# EAGLE board NSE2022_BATTERY_ver0 (EAGLE 9.6.0)
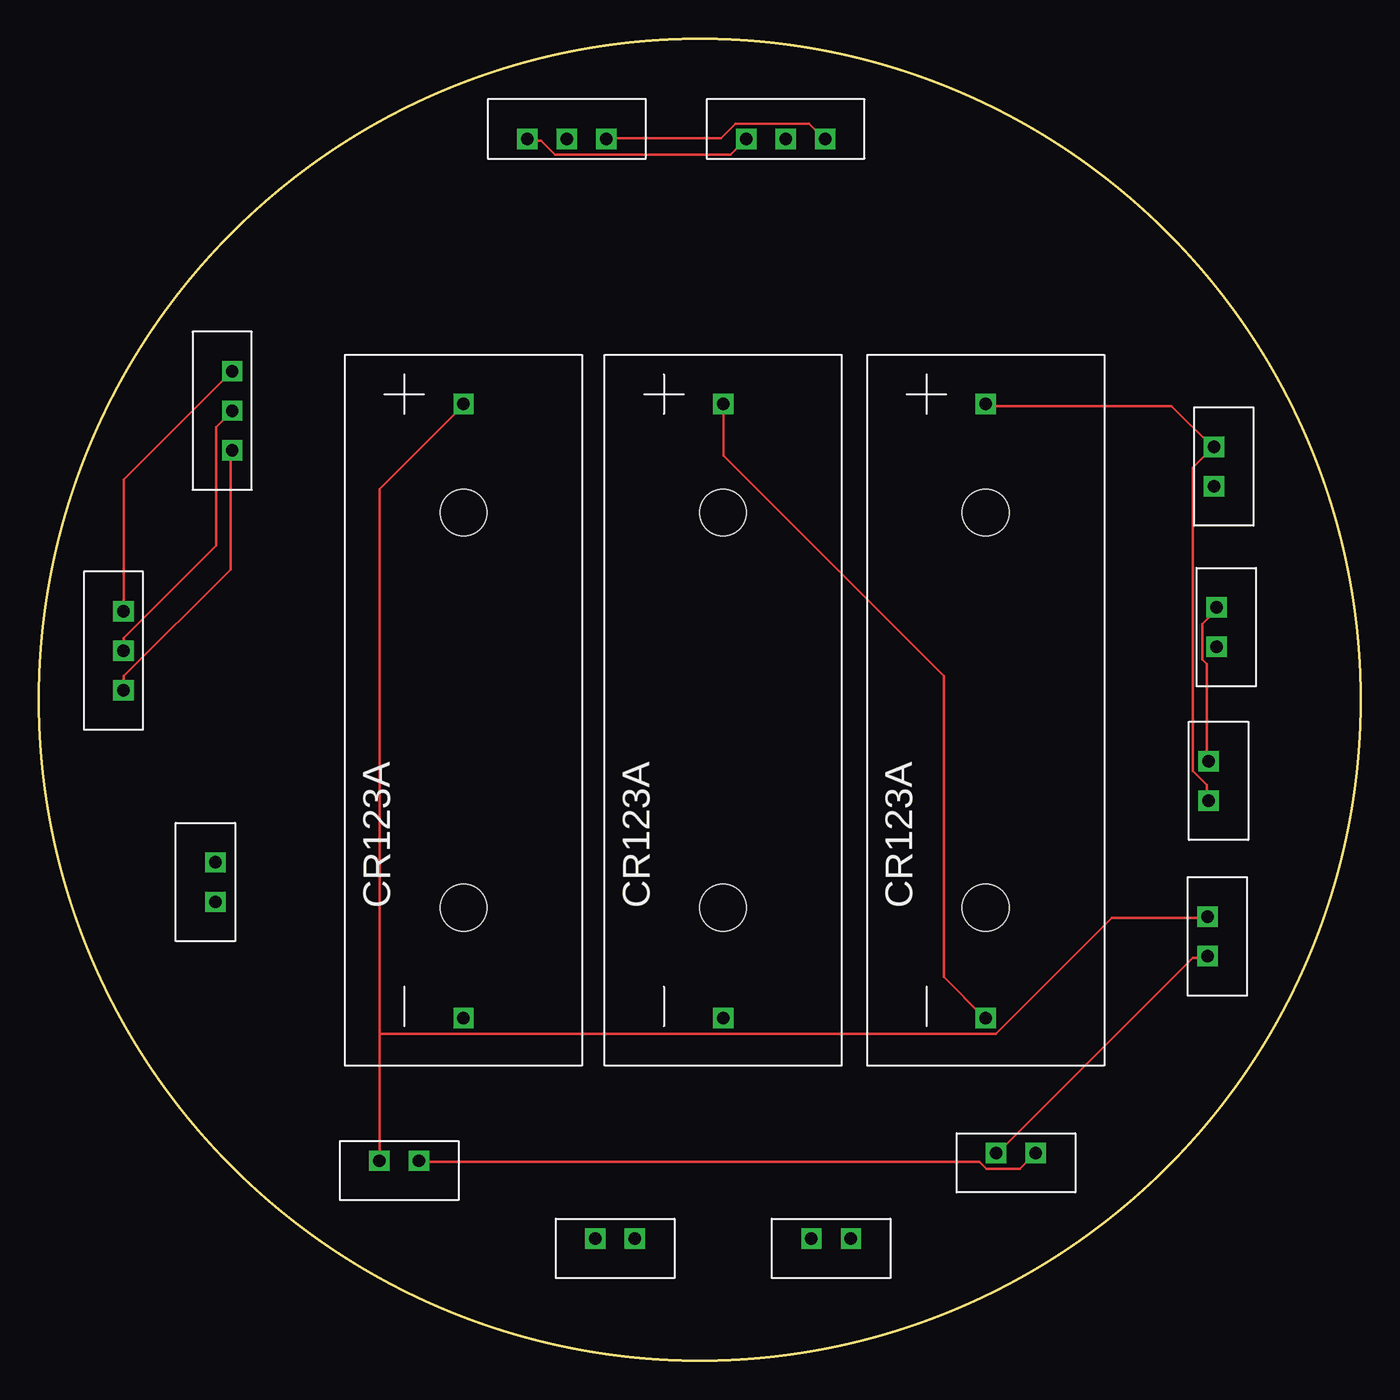
[diagram p0: board, top side]
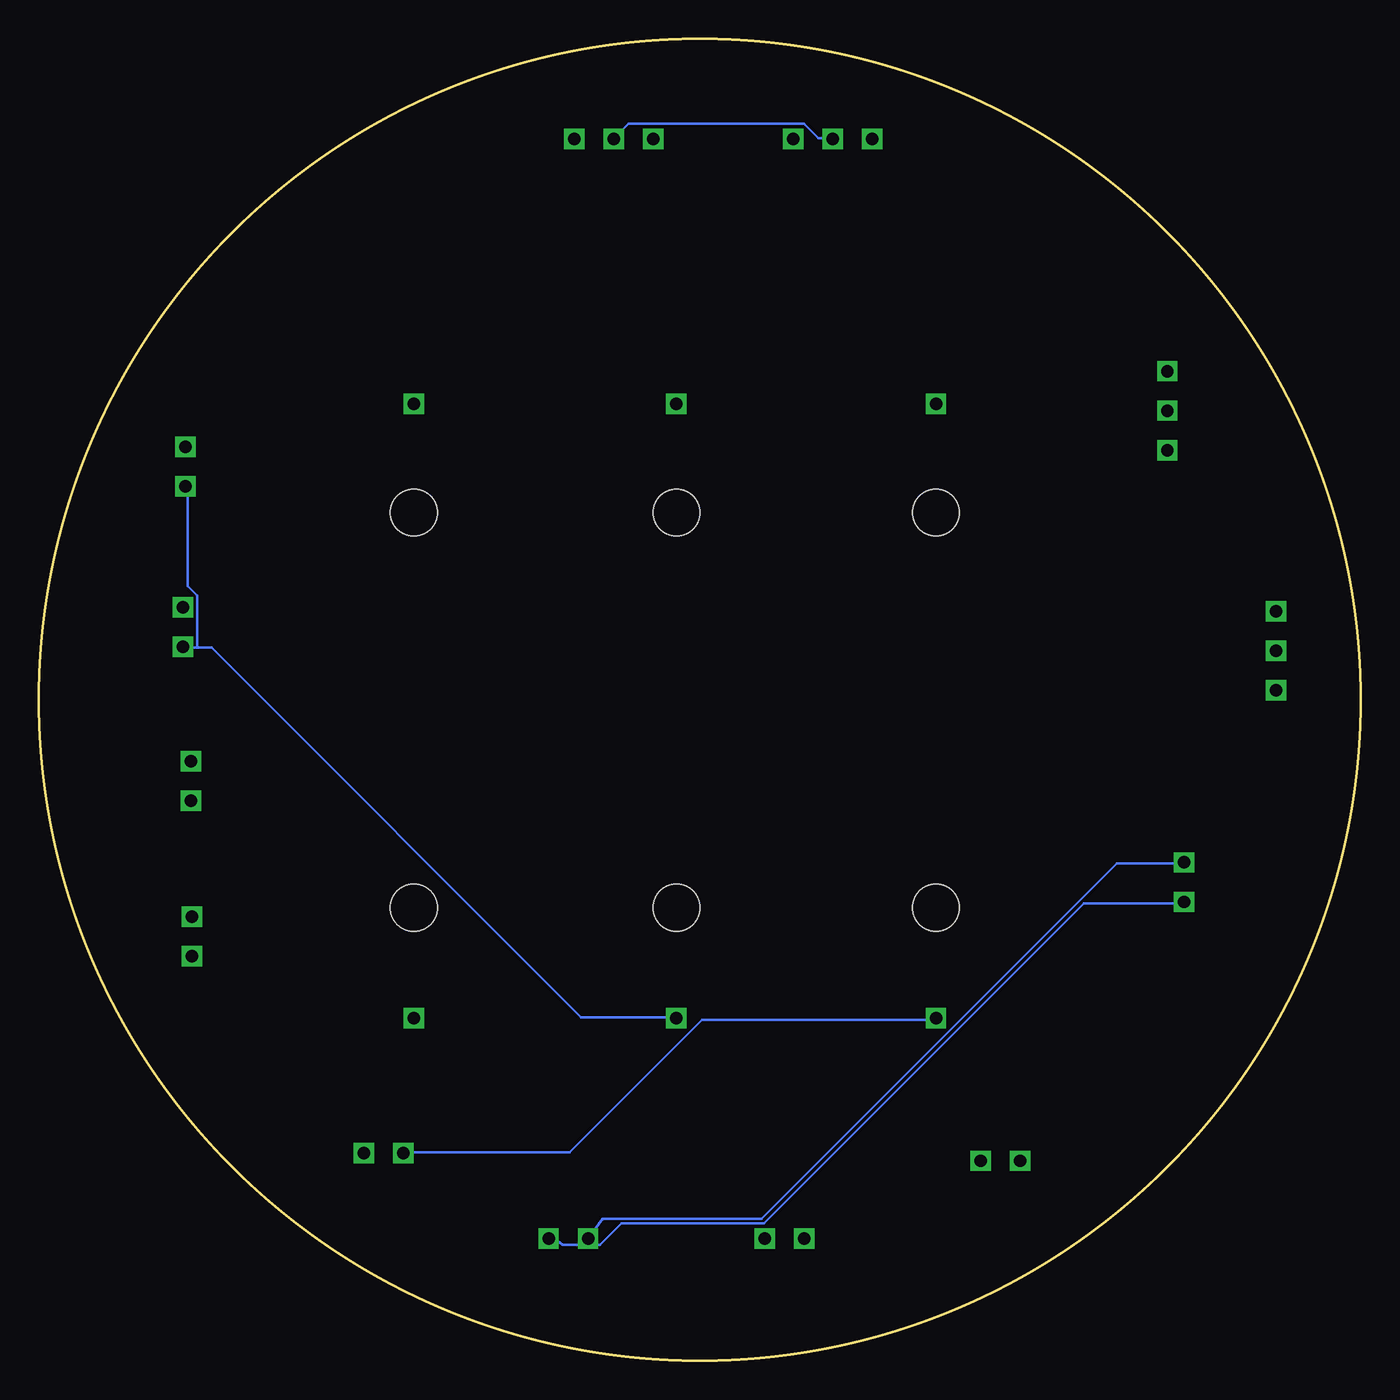
[diagram p1: board, bottom side, seen from below]

Size 85 x 85 mm. Coordinates in mm from the lower left corner, seen from the top.
Outline: circle at 42.5,42.5 radius 42.5
Copper layers (1*16): Top 0.035mm / dielectric 1.5mm / Bottom 0.035mm
Design rules "default": minimum track width 6mil, minimum drill 0.35mm, track to track 6mil, track to pad 6mil, pad to pad 6mil, via to via 6mil, smd to smd 6mil, copper to edge 40mil, drill to drill 6mil, minimum pad ring 10mil, minimum via ring 8mil, stop-mask expansion 4mil, vias tented up to drill 0mil, thermal gap 10mil

## Footprints (pad centres in the part's own frame; a part is rotated, then mirrored left to right if it is on the bottom)
CR123A = drill 0.8 square: MINUS 32.5,0; PULUS -7,0 | hole 3: 0,0; 25.4,0
2PIN = drill 0.8 square: PIN1 1.27,0; PIN2 3.81,0
3PIN = drill 0.8 square: PIN1 1.27,0; PIN2 3.81,0; PIN3 6.35,0

## Placement (x,y rotation side)
U$25  CR123A  [CR123A]  60.89,54.53 270 top
U$34  CR123A  [CR123A]  44,54.53 270 top
U$38  CR123A  [CR123A]  27.31,54.53 270 top
U$41  2PIN  [2PIN]  75.57,60.04 270 top
U$45  2PIN  [2PIN]  75.15,29.82 270 top
U$56  2PIN  [2PIN]  25.71,12.85 180 top
U$57  2PIN  [2PIN]  39.6,7.85 180 top
U$58  2PIN  [2PIN]  53.49,7.85 180 top
U$59  3PIN  [3PIN]  30.14,78.57 0 top
U$60  3PIN  [3PIN]  44.21,78.57 0 top
U$61  3PIN  [3PIN]  12.43,57.28 90 top
U$62  3PIN  [3PIN]  5.43,41.85 90 top
U$65  2PIN  [2PIN]  65.38,13.35 180 top
U$66  2PIN  [2PIN]  11.35,28.23 90 top
U$67  2PIN  [2PIN]  75.23,39.82 270 top
U$68  2PIN  [2PIN]  75.73,49.71 270 top

## Library data of the parts
U$25 U$34 U$38 = CR123A
U$41 U$45 U$56-U$58 U$65-U$68 = 2PIN
U$59-U$62 = 3PIN

## Nets
3V+IN: U$56.PIN1 U$65.PIN1
3V+OUT: U$38.PULUS U$45.PIN1 U$56.PIN2
3V-OUT: U$38.MINUS U$45.PIN2 U$65.PIN2
6V+IN: U$67.PIN1 U$68.PIN1
6V+OUT: U$25.PULUS U$41.PIN1 U$67.PIN2
6V-OUT: U$34.MINUS U$41.PIN2 U$68.PIN2
APIN1: U$59.PIN3 U$60.PIN3
APIN2: U$59.PIN2 U$60.PIN2
APIN3: U$59.PIN1 U$60.PIN1
BPIN1: U$61.PIN3 U$62.PIN3
BPIN2: U$61.PIN2 U$62.PIN2
BPIN3: U$61.PIN1 U$62.PIN1
FP+IN: U$57.PIN1
FP+OUT: U$58.PIN1 U$66.PIN1
FP-IN: U$57.PIN2
FP-OUT: U$58.PIN2 U$66.PIN2
N$13: U$25.MINUS U$34.PULUS

## Tracks (layer width: path | path; a pad name or v marks a point on that pad's centre or on a via)
3V+IN
  Top 0.152: U$56.PIN1 24.52,12.78 60.48,12.78 60.94,12.32 63.07,12.32 63.99,13.24 U$65.PIN1
3V+OUT
  Top 0.152: 21.93,21.01 21.93,56.06 27.26,61.4 U$38.PULUS | 21.93,21.01 21.93,12.93 U$56.PIN2 | 21.93,21.01 61.55,21.01 69.02,28.48 75.11,28.48 U$45.PIN1
3V-OUT
  Top 0.152: U$45.PIN2 75.11,25.89 74.2,25.89 61.7,13.39 U$65.PIN2
  Bottom 0.152: U$38.MINUS 27.41,21.93 42.35,21.93 50.88,13.39 61.55,13.39 U$65.PIN2
6V+IN
  Top 0.152: U$67.PIN1 75.11,38.69 75.11,44.79 74.81,45.09 74.81,47.38 75.72,48.29 U$68.PIN1
6V+OUT
  Top 0.152: U$25.PULUS 60.94,61.4 72.83,61.4 75.42,58.81 U$41.PIN1 75.42,58.65 74.2,57.44 74.2,37.93 75.11,37.01 75.11,36.1 U$67.PIN2
6V-OUT
  Bottom 0.152: 74.81,45.85 75.72,45.85 U$68.PIN2 | 74.81,45.85 73.89,45.85 50.12,22.08 44.02,22.08 U$34.MINUS | 74.81,45.85 74.81,49.21 75.42,49.81 75.42,56.22 U$41.PIN2
APIN1
  Top 0.152: U$59.PIN3 36.56,78.62 43.87,78.62 44.79,79.53 49.51,79.53 50.42,78.62 U$60.PIN3
APIN2
  Bottom 0.152: U$59.PIN2 33.97,78.62 34.88,78.62 35.79,79.53 47.07,79.53 47.99,78.62 U$60.PIN2
APIN3
  Top 0.152: U$59.PIN1 31.53,78.47 32.29,78.47 33.2,77.55 44.48,77.55 45.4,78.47 U$60.PIN1
BPIN1
  Top 0.152: U$62.PIN3 5.47,48.29 5.47,56.67 12.32,63.53 U$61.PIN3
BPIN2
  Top 0.152: U$62.PIN2 5.47,45.7 5.47,46.46 11.41,52.41 11.41,60.03 12.32,60.94 U$61.PIN2
BPIN3
  Top 0.152: U$62.PIN1 5.47,43.26 5.47,44.02 12.32,50.88 12.32,58.5 U$61.PIN1
FP+OUT
  Bottom 0.152: U$66.PIN1 11.41,29.39 17.81,29.39 38.38,8.82 47.53,8.82 48.9,7.45 51.34,7.45 51.81,7.85 U$58.PIN1
FP-OUT
  Bottom 0.152: U$66.PIN2 11.41,31.98 15.68,31.98 38.54,9.12 48.76,9.12 U$58.PIN2
N$13
  Top 0.152: U$34.PULUS 44.02,61.4 44.02,58.2 58.2,44.02 58.2,24.67 60.79,22.08 U$25.MINUS